# Altium PCB SDC-LE-05.PcbDoc
Units mm, origin at the board's own origin, x right, y up, seen from the top; angles counter-clockwise.
Board outline 152.4 x 101.6 mm, 2 copper layers (Top Layer, Bottom Layer); 1 components, 0 nets, 18 pads, 0 vias.
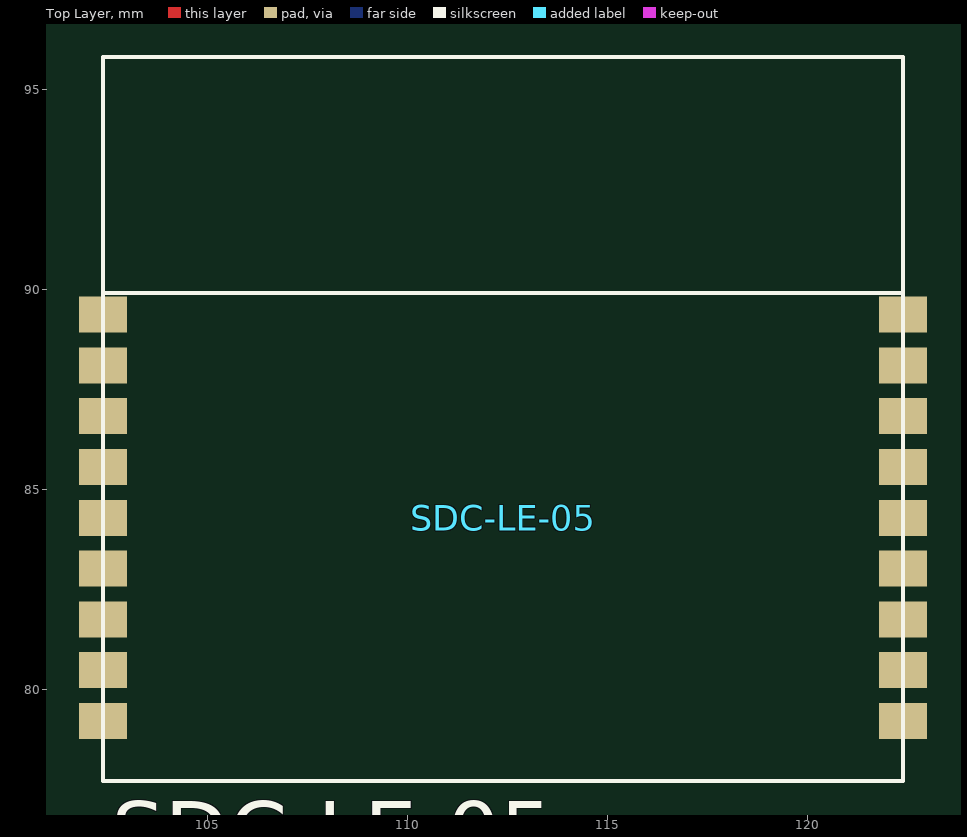
[diagram p0: Top Layer view]
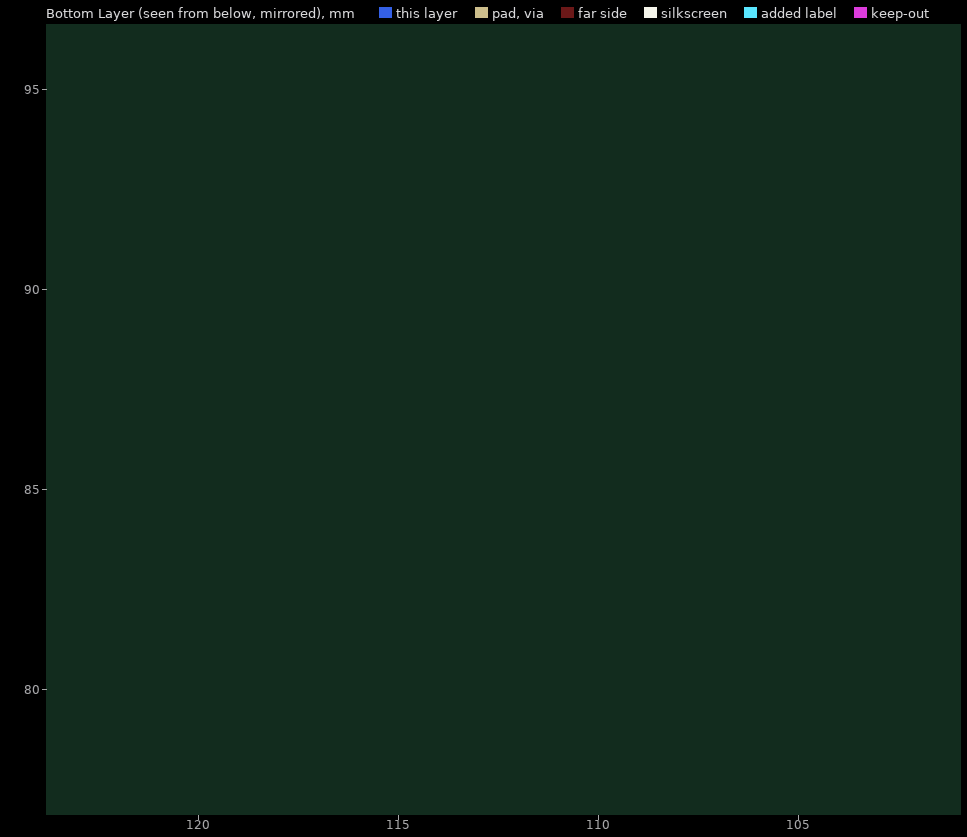
[diagram p1: Bottom Layer view, seen from below]

## Layer stack, top to bottom
Top Solder: solder mask 0.0102, Solder Resist, Dk 3.5
Top Layer: signal copper 0.0356
Dielectric 1: dielectric 0.32, FR-4, Dk 4.8
Bottom Layer: signal copper 0.0356
Bottom Solder: solder mask 0.0102, Solder Resist, Dk 3.5

## Board outline
25.4,25.4 177.8,25.4 177.8,127 25.4,127

## Design rules (kind name [scope] priority, off if disabled: settings)
Clearance [All] p1: gap=0.254
PolygonConnect [All] p1: connectstyle=Relief reliefconductorwidth=0.254 reliefentries=4 polygonreliefangle="90 Angle" airgapwidth=0.254
RoutingVias [All] p1: holewidth=0.711 width=1.27 viastyle="Through Hole" minholewidth=0.711 minwidth=1.27 maxholewidth=0.711 maxwidth=1.27
SolderMaskExpansion [All] p1: expansion=0.102
Width [All] p1: maxlimit=0.254 minlimit=0.254 preferedwidth=0.254
29 further rules are at their usual default settings.

## Components (designator, comment, footprint, x,y, rotation, side; value= is the part's Value field where it differs from the comment)
SDC-LE-05 "Comment" PCBComponent_1 112.395,77.724 r0 top

## Footprints (in the part's own frame and the unit in brackets; to place one, negate y for a bottom-side part, rotate by r counter-clockwise, add the part's x,y. Pads: shape width x height; smd on the part's side, far side on the other; paste and mask are expansions set on the pad)
PCBComponent_1 [mm]
  rect 1.2x0.9 smd: 1(-10,11.66) 2(-10,10.39) 3(-10,9.12) 4(-10,7.85) 5(-10,6.58) 6(-10,5.31) 7(-10,4.04) 8(-10,2.77) 9(-10,1.5) 10(10,1.5) 11(10,2.77) 12(10,4.04) 13(10,5.31) 14(10,6.58) 15(10,7.85) 16(10,9.12) 17(10,10.39) 18(10,11.66)
  silkscreen extent -10,0 10,18.1

## Nets (pads, with @x,y where several pads share a name; then routed paths per layer and width w, separated by ;. In a path a pad name is that pad's centre, name@x,y a point inside that pad or via, vN(x,y) a via of type N, cw(c..) or ccw(c..) an arc to the next point about the centre after c; other vN are vias at no path point)
pads on no net: SDC-LE-05.1 SDC-LE-05.2 SDC-LE-05.3 SDC-LE-05.4 SDC-LE-05.5 SDC-LE-05.6 SDC-LE-05.7 SDC-LE-05.8 SDC-LE-05.9 SDC-LE-05.10 SDC-LE-05.11 SDC-LE-05.12 SDC-LE-05.13 SDC-LE-05.14 SDC-LE-05.15 SDC-LE-05.16 SDC-LE-05.17 SDC-LE-05.18